# Altium PCB PCB1.PcbDoc
Units mil, origin at the board's own origin, x right, y up, seen from the top; angles counter-clockwise.
Board outline 8750 x 3800 mil, 2 copper layers (Top Layer, Bottom Layer); 78 components, 69 nets, 287 pads, 19 vias.
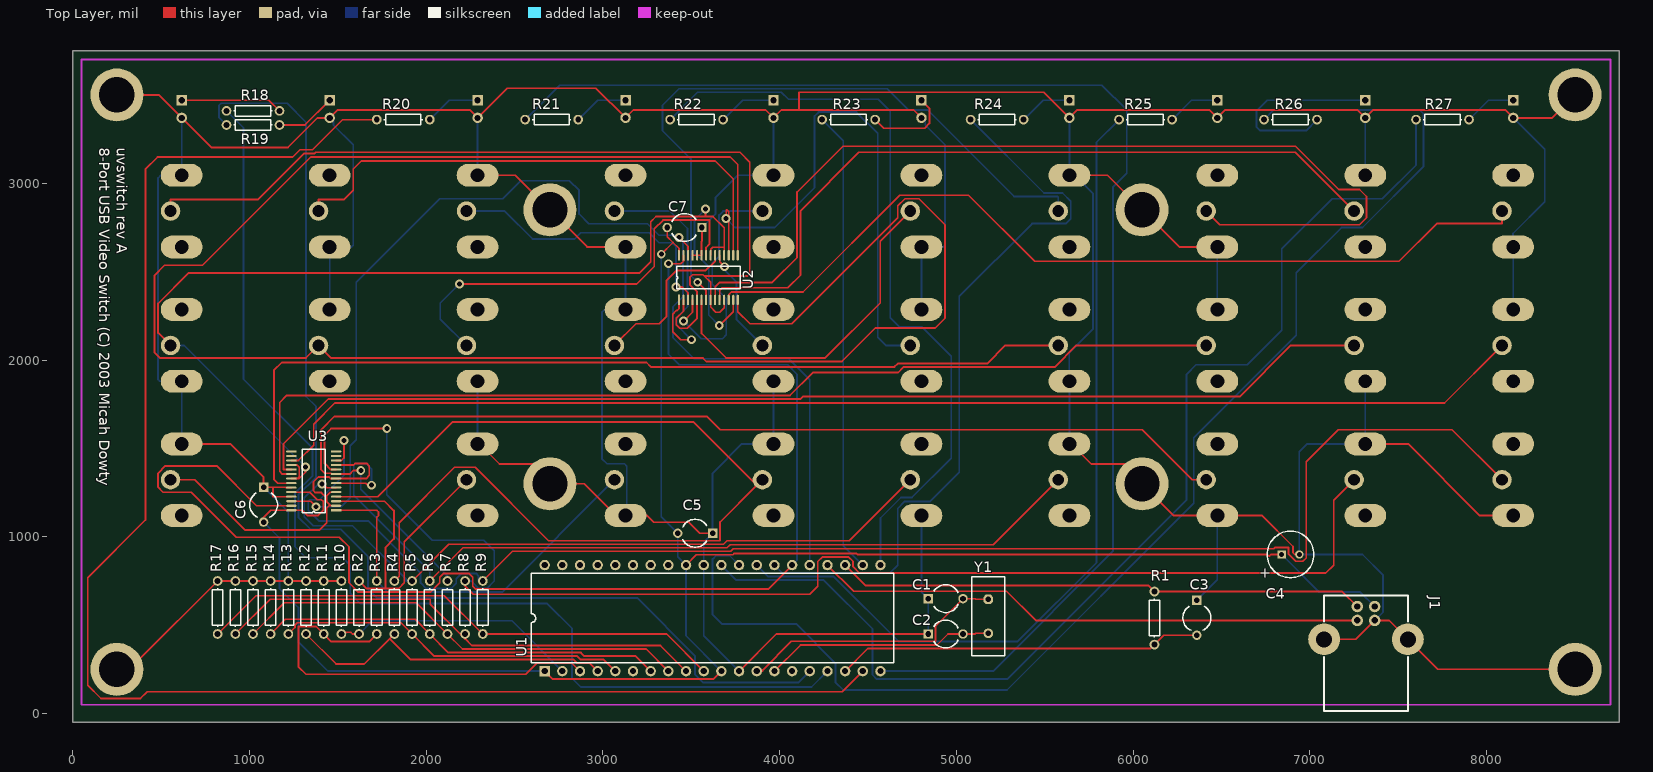
[diagram p0: Top Layer view]
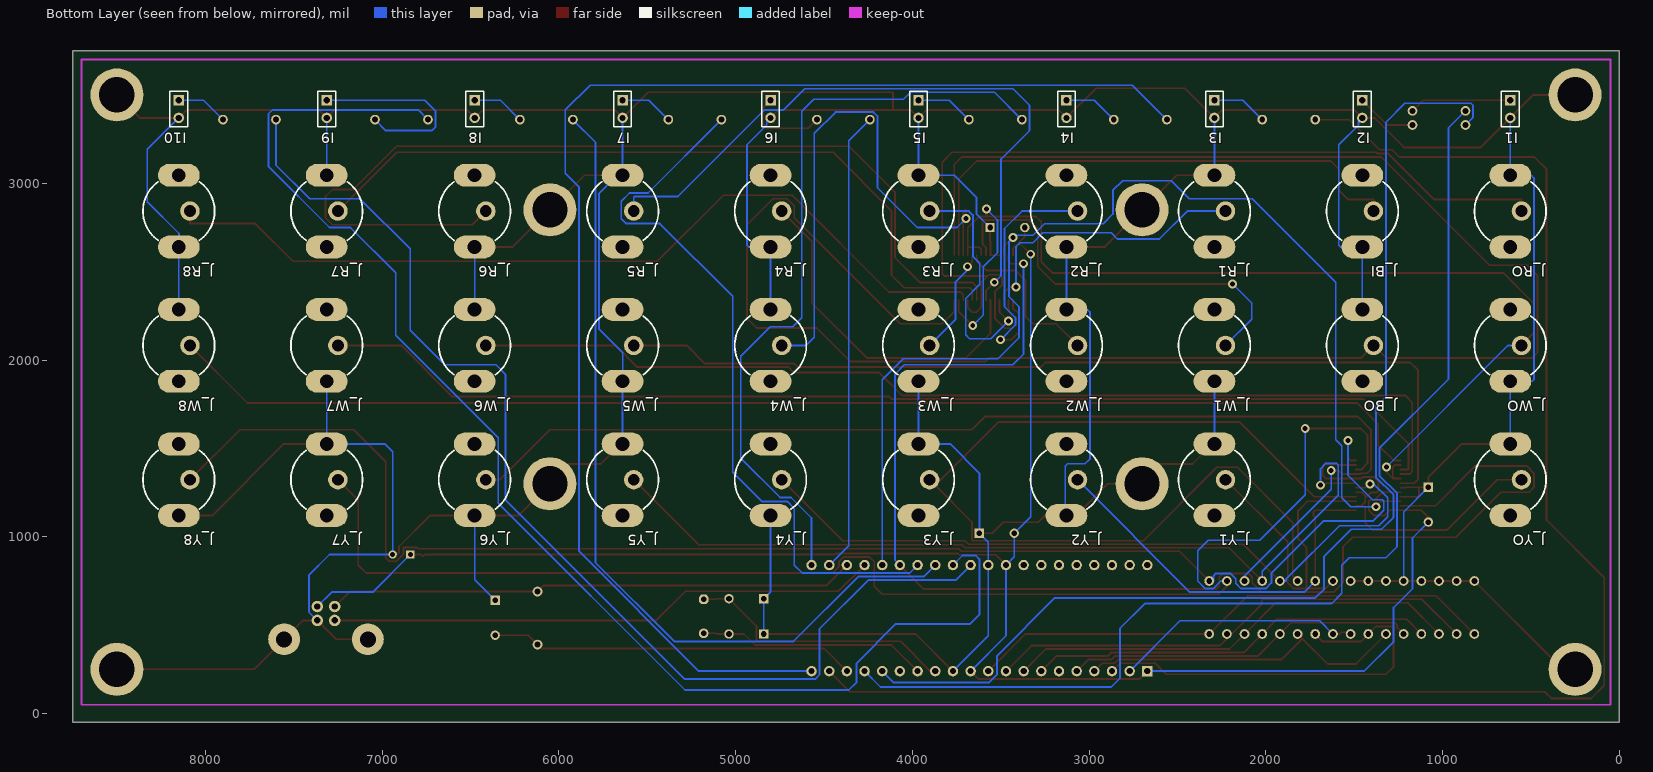
[diagram p1: Bottom Layer view, seen from below]

## Layer stack, top to bottom
Top Layer: signal copper 1.4
Dielectric: dielectric 12.6, FR-4, Dk 4.8
Bottom Layer: signal copper 1.4

## Board outline
0,-50 8750,-50 8750,3750 0,3750

## Design rules (kind name [scope] priority, off if disabled: settings)
Clearance [All] p1: gap=10
ComponentClearance [All] p1: gap=10 collisioncheckmode=0
HoleSize [All] p1: absolutevalues=TRUE maxlimit=200 minlimit=1 maxpercent=80.000 minpercent=20.000
PolygonConnect [All] p1: connectstyle=Relief reliefconductorwidth=10 reliefentries=4 polygonreliefangle="90 Angle"
RoomDefinition Sheet1 [InComponentClass('Sheet1')] p1: confinementstyle=ConfineIn formatcopy=TRUE outline 0,0 8750,0 8750,3750 0,3750
RoutingLayers [All] p1: top layer=Horizontal bottom layer=Vertical
RoutingVias [All] p1: holewidth=28 width=50 viastyle="Through Hole" minholewidth=28 minwidth=50 maxholewidth=28 maxwidth=50
SolderMaskExpansion [All] p1: expansion=4
TestPointUsage [All] p1: valid=0 allowmultiple=FALSE
Testpoint [All] p1: side=15 testpointundercomponent=TRUE minsize=40 maxsize=100 preferedsize=60 minholesize=0 maxholesize=40 preferedholesize=32 testpointgrid=1 style=1023 order=1234567890
Width [All] p1: maxlimit=10 minlimit=10 preferedwidth=10
15 further rules are at their usual default settings.

## Components (designator, comment, footprint, x,y, rotation, side; value= is the part's Value field where it differs from the comment)
C1 "Cap2" CAPR5-4X5 4840,650 r0 top
C2 "Cap2" CAPR5-4X5 4840,450 r0 top
C3 "" CAPR5-4X5 6360,640 r270 top
C4 "10uF" CAP-EE-1 6740,900 r180 top
C5 "" CAPR5-4X5 3620,1020 r180 top
C6 "" CAPR5-4X5 1080,1280 r270 top
C7 "" CAPR5-4X5 3560,2750 r180 top
I1 "" HDR1X2 616.67,3470 r270 bottom
I2 "" HDR1X2 1453.7,3470 r270 bottom
I3 "" HDR1X2 2290.74,3470 r270 bottom
I4 "" HDR1X2 3127.78,3470 r270 bottom
I5 "" HDR1X2 3964.81,3470 r270 bottom
I6 "" HDR1X2 4801.85,3470 r270 bottom
I7 "" HDR1X2 5638.89,3470 r270 bottom
I8 "" HDR1X2 6475.92,3470 r270 bottom
I9 "" HDR1X2 7312.96,3470 r270 bottom
I10 "" HDR1X2 8150,3470 r270 bottom
J1 "USB" USB-TYPEB 7080,420 r0 top
J_BI "" RCJ-02X 1453.7,3045.51 r270 bottom
J_BO "" RCJ-02X 1453.7,2285.51 r270 bottom
J_R1 "" RCJ-02X 2290.74,3045.51 r270 bottom
J_R2 "" RCJ-02X 3127.78,3045.51 r270 bottom
J_R3 "" RCJ-02X 3964.81,3045.51 r270 bottom
J_R4 "" RCJ-02X 4801.85,3045.51 r270 bottom
J_R5 "" RCJ-02X 5638.89,3045.51 r270 bottom
J_R6 "" RCJ-02X 6475.92,3045.51 r270 bottom
J_R7 "" RCJ-02X 7312.96,3045.51 r270 bottom
J_R8 "" RCJ-02X 8150,3045.51 r270 bottom
J_RO "" RCJ-02X 616.67,3045.51 r270 bottom (schematic designator J_YO)
J_W1 "" RCJ-02X 2290.74,2285.51 r270 bottom
J_W2 "" RCJ-02X 3127.78,2285.51 r270 bottom
J_W3 "" RCJ-02X 3964.81,2285.51 r270 bottom
J_W4 "" RCJ-02X 4801.85,2285.51 r270 bottom
J_W5 "" RCJ-02X 5638.89,2285.51 r270 bottom
J_W6 "" RCJ-02X 6475.92,2285.51 r270 bottom
J_W7 "" RCJ-02X 7312.96,2285.51 r270 bottom
J_W8 "" RCJ-02X 8150,2285.51 r270 bottom
J_WO "" RCJ-02X 616.67,2285.51 r270 bottom
J_Y1 "" RCJ-02X 2290.74,1525.51 r270 bottom
J_Y2 "" RCJ-02X 3127.78,1525.51 r270 bottom
J_Y3 "" RCJ-02X 3964.81,1525.51 r270 bottom
J_Y4 "" RCJ-02X 4801.85,1525.51 r270 bottom
J_Y5 "" RCJ-02X 5638.89,1525.51 r270 bottom
J_Y6 "" RCJ-02X 6475.92,1525.51 r270 bottom
J_Y7 "" RCJ-02X 7312.96,1525.51 r270 bottom
J_Y8 "" RCJ-02X 8150,1525.51 r270 bottom
J_YO "" RCJ-02X 616.67,1525.51 r270 bottom
R1 "Res1" AXIAL-0.3 6120,540 r90 top
R2 "" AXIAL-0.3 1620,600 r270 top
R3 "" AXIAL-0.3 1720,600 r270 top
R4 "" AXIAL-0.3 1820,600 r270 top
R5 "" AXIAL-0.3 1920,600 r270 top
R6 "" AXIAL-0.3 2020,600 r270 top
R7 "" AXIAL-0.3 2120,600 r270 top
R8 "" AXIAL-0.3 2220,600 r270 top
R9 "" AXIAL-0.3 2320,600 r270 top
R10 "" AXIAL-0.3 1520,600 r90 top
R11 "" AXIAL-0.3 1420,600 r90 top
R12 "" AXIAL-0.3 1320,600 r90 top
R13 "" AXIAL-0.3 1220,600 r90 top
R14 "" AXIAL-0.3 1120,600 r90 top
R15 "" AXIAL-0.3 1020,600 r90 top
R16 "" AXIAL-0.3 920,600 r90 top
R17 "" AXIAL-0.3 820,600 r90 top
R18 "" AXIAL-0.3 1020,3410 r180 top
R19 "" AXIAL-0.3 1020,3330 r180 top
R20 "" AXIAL-0.3 1870,3360 r180 top
R21 "" AXIAL-0.3 2710,3360 r180 top
R22 "" AXIAL-0.3 3530,3360 r180 top
R23 "" AXIAL-0.3 4390,3360 r180 top
R24 "" AXIAL-0.3 5230,3360 r180 top
R25 "" AXIAL-0.3 6070,3360 r180 top
R26 "" AXIAL-0.3 6890,3360 r180 top
R27 "" AXIAL-0.3 7750,3360 r180 top
U1 "PIC16C765" DIP-40 3620,540 r0 top
U2 "MAX4572" SSOP28 3430,2340 r90 top
U3 "MAX4572" SSOP28 1490,1150 r180 top
Y1 "6 MHz" BCY-W2/E4.7 5180,550 r270 top

## Footprints (in the part's own frame and the unit in brackets; to place one, negate y for a bottom-side part, rotate by r counter-clockwise, add the part's x,y. Pads: shape width x height; smd on the part's side, far side on the other; paste and mask are expansions set on the pad)
AXIAL-0.3 [mm]
  round 1.4 hole 0.85: 1(-3.81,0) 2(3.81,0)
  silkscreen extent -2.77,-0.76 2.77,0.76
BCY-W2/E4.7 [mm]
  oct 1.4x1.4 hole 0.8: 1(-2.44,0)
  round 1.4 hole 0.8: 2(2.44,0)
  silkscreen extent -5.7,-2.35 5.7,2.35
CAP-EE-1 [mm]
  rect 1.2x1.2 hole 0.7: 1(-2.54,0)
  round 1.2 hole 0.7: 2(-5.08,0)
  silkscreen extent -7.15,-3.34 -0.47,3.34
CAPR5-4X5 [mm]
  rect 1.35x1.35 hole 0.8: 1(0,0)
  round 1.35 hole 0.8: 2(5,0)
  silkscreen extent 0.81,-2 4.32,2
DIP-40 [mm]
  rect 1.5x1.5 hole 0.9: 1(-24.13,-7.62)
  round 1.5 hole 0.9: 2(-21.59,-7.62) 3(-19.05,-7.62) 4(-16.51,-7.62) 5(-13.97,-7.62) 6(-11.43,-7.62) 7(-8.89,-7.62) 8(-6.35,-7.62) 9(-3.81,-7.62) 10(-1.27,-7.62) 11(1.27,-7.62) 12(3.81,-7.62) 13(6.35,-7.62) 14(8.89,-7.62) 15(11.43,-7.62) 16(13.97,-7.62) 17(16.51,-7.62) 18(19.05,-7.62) 19(21.59,-7.62) 20(24.13,-7.62) 21(24.13,7.62) 22(21.59,7.62) 23(19.05,7.62) 24(16.51,7.62) 25(13.97,7.62) 26(11.43,7.62) 27(8.89,7.62) 28(6.35,7.62) 29(3.81,7.62) 30(1.27,7.62) 31(-1.27,7.62) 32(-3.81,7.62) 33(-6.35,7.62) 34(-8.89,7.62) 35(-11.43,7.62) 36(-13.97,7.62) 37(-16.51,7.62) 38(-19.05,7.62) 39(-21.59,7.62) 40(-24.13,7.62)
  silkscreen extent -26.05,-6.45 26.05,6.45
HDR1X2 [mm]
  rect 1.5x1.5 hole 0.9: 1(0,0)
  round 1.5 hole 0.9: 2(2.54,0)
  silkscreen extent -1.27,-1.27 3.81,1.27
RCJ-02X [mm]
  round 2.794 hole 1.7: 1(5.15,1.6)
  oval 3.302x6 hole 2: 2(0,0) 2(10.3,0)
  silkscreen extent 0.93,-5.15 9.37,5.15
SSOP28 [mm]
  rect 1.5x0.3 smd: 1(0,0)
  oval 1.5x0.3 smd: 2(0,-0.65) 3(0,-1.3) 4(0,-1.95) 5(0,-2.6) 6(0,-3.25) 7(0,-3.9) 8(0,-4.55) 9(0,-5.2) 10(0,-5.85) 11(0,-6.5) 12(0,-7.15) 13(0,-7.8) 14(0,-8.45) 15(6.42,-8.45) 16(6.42,-7.8) 17(6.42,-7.15) 18(6.42,-6.5) 19(6.42,-5.85) 20(6.42,-5.2) 21(6.42,-4.55) 22(6.42,-3.9) 23(6.42,-3.25) 24(6.42,-2.6) 25(6.42,-1.95) 26(6.42,-1.3) 27(6.42,-0.65) 28(6.42,0)
  silkscreen extent 1.59,-8.78 4.83,0.33
USB-TYPEB [mil]
  round 65 hole 36.22: 1(286.22,185.43) 2(187.8,185.43) 3(187.8,106.69) 4(286.22,106.69)
  round 180 hole 90.55: 5(0,0) 5(474.02,0)
  silkscreen extent 0,-406 474,248

## Part data
C1 C2: "Capacitor"
C3 C5 C6 C7: library part Cap2, "Capacitor"
C4: library part "Cap Pol1", "Polarized Capacitor (Radial)"
I1 I2 I3 I4 I5 I6 I7 I8 I9 I10: library part LED1, "Typical RED GaAs LED"
J1: library part "USB Type B", "Header, 4-Pin"
J_BI J_BO J_R1 J_R2 J_R3 J_R4 J_R5 J_R6 J_R7 J_R8 J_RO J_W1 J_W2 J_W3 J_W4 J_W5 J_W6 J_W7 J_W8 J_WO J_Y1 J_Y2 J_Y3 J_Y4 J_Y5 J_Y6 J_Y7 J_Y8 J_YO: library part RCA-COMPACT, "RCA Connector"
R1: "Resistor"
R2 R3 R4 R5 R6 R7 R8 R9 R10 R11 R12 R13 R14 R15 R16 R17 R18 R19 R20 R21 R22 R23 R24 R25 R26 R27: library part Res1, "Resistor"
U1: "EPROM-Based 8-Bit CMOS Microcontroller with USB"
U2 U3: "Serially Controlled, Clickless Audio/Video switch"
Y1: library part XTAL, "Crystal Oscillator"

## Free pads (board coordinates)
  round 300 hole 200: 0(250,250) 0(250,3500) 0(2700,1300) 0(2700,2850) 0(6050,1300) 0(6050,2850) 0(8500,250) 0(8500,3500)

## Via types
v1: diameter 50, hole 28, Top Layer to Bottom Layer, 19 vias

## Nets (pads, with @x,y where several pads share a name; then routed paths per layer and width w, separated by ;. In a path a pad name is that pad's centre, name@x,y a point inside that pad or via, vN(x,y) a via of type N, cw(c..) or ccw(c..) an arc to the next point about the centre after c; other vN are vias at no path point)
GND: C1.1 C2.1 C3.1 C4.2 C5.1 C6.1 C7.1 I1.2 I2.2 I3.2 I4.2 I5.2 I6.2 I7.2 I8.2 I9.2 I10.2 J1.4 J1.5 J_BI.2@1453.7,2640 J_BO.2@1453.7,2285.51 J_R1.2@2290.74,3045.51 J_R2.2@3127.78,2640 J_R3.2@3964.81,3045.51 J_R4.2@4801.85,2640 J_R5.2@5638.89,3045.51 J_R6.2@6475.92,2640 J_R7.2@7312.96,3045.51 J_R8.2@8150,2640 J_RO.2@616.67,3045.51 J_W1.2@2290.74,1880 J_W2.2@3127.78,2285.51 J_W3.2@3964.81,1880 J_W4.2@4801.85,2285.51 J_W5.2@5638.89,1880 J_W6.2@6475.92,2285.51 J_W7.2@7312.96,1880 J_W8.2@8150,2285.51 J_WO.2@616.67,1880 J_Y1.2@2290.74,1525.51 J_Y2.2@3127.78,1120 J_Y3.2@3964.81,1525.51 J_Y4.2@4801.85,1120 J_Y5.2@5638.89,1525.51 J_Y6.2@6475.92,1120 J_Y7.2@7312.96,1525.51 J_Y8.2@8150,1120 J_YO.2@616.67,1525.51 pad.0 R10.2 R11.2 R12.2 R13.2 R14.2 R15.2 R16.2 R17.2 U1.12 U1.31 U2.23 U2.24 U2.25 U3.23 U3.25 | length 39159.5
  Top Layer w10: pad.0@250,250 250,307 377,307 R17.2 R16.2 R15.2 R14.2 R13.2 R12.2 R11.2 R10.2 ; pad.0@250,3500 486.67,3500 I1.2 783.67,3203 1218,3203 1385,3370 I2.2 1498.7,3415 2245.74,3415 I3.2 2458.74,3538 2959.78,3538 I4.2 3172.78,3415 3919.82,3415 I5.2 4009.81,3415 4109.81,3415 ; J_YO.2@616.67,1525.51 891.49,1525.51 1080,1337 C6.1 1133.23,1280 ; U3.25 1133.23,1226.77 1133.23,1280 ; U3.23 1207.05,1277.95 1205,1280 1133.23,1280 ; J_Y1.2@2290.74,1525.51 2301,1525.51 2414.51,1412 2700,1412 2700,1300 2895,1300 3075,1120 3127.78,1120 3250,1120 3288,1082 3485,1082 3547,1020 C5.1 ; J_R1.2@2290.74,3045.51 2504.49,3045.51 2700,2850 2910,2640 J_R2.2@3127.78,2640 ; U2.25 U2.24 U2.23 3557.95,2670 3560,2672.05 C7.1 ; U1.12 3980,450 C2.1 ; I6.2 4756.85,3415 4109.81,3415 ; J_Y5.2@5638.89,1525.51 5649,1525.51 5762.51,1412 6050,1412 6050,1300 6230,1120 6475.92,1120 6729,1120 6904,945 6904,910 6914,900 C4.2 ; J_R5.2@5638.89,3045.51 5854.49,3045.51 6050,2850 6260,2640 J_R6.2@6475.92,2640 ; J1.5@7080,420 7259.53,420 J1.4 7447.32,526.69 7554.02,420 7724.02,250 pad.0@8500,250 ; J_Y7.2@7312.96,1525.51 7555.49,1525.51 7961,1120 J_Y8.2@8150,1120 ; pad.0@8500,3500 8370,3370 I10.2 8105,3415 7357.96,3415 I9.2 7267.96,3415 6520.92,3415 I8.2 6430.93,3415 5683.89,3415 I7.2 5493.89,3515 4109.81,3515 4109.81,3415
  Bottom Layer w10: J_YO.2@616.67,1525.51 616.67,1880 493,1880 483,1890 483,3030 498.51,3045.51 616.67,3045.51 I1.2 ; C6.1 1220,1140 R13.2 ; J_BO.2@1453.7,2285.51 1453.7,2640 1577,2640 1587,2650 1587,3218 1475,3330 1475,3370 I2.2 ; J_Y1.2@2290.74,1525.51 J_W1.2@2290.74,1880 ; J_R1.2@2290.74,3045.51 I3.2 ; J_Y2.2@3127.78,1120 3135,1120 3135,1400 3122,1413 3023,1413 2994,1442 2994,2270 3009.51,2285.51 3127.78,2285.51 J_R2.2@3127.78,2640 ; C7.1 3637,2827 3637,2920 3762.51,3045.51 3964.81,3045.51 I5.2 ; U1.12 3570,440 U1.31 3570,970 C5.1 3620,1360 3785.51,1525.51 3964.81,1525.51 J_W3.2@3964.81,1880 ; J_Y4.2@4801.85,1120 4801.85,688.15 C1.1 C2.1 ; J_W4.2@4801.85,2285.51 4801.85,2640 4925,2640 4935,2650 4935,3218 4823,3330 4823,3370 I6.2 ; J_Y5.2@5638.89,1525.51 5638.89,1880 5638,1880 5638,2041 5772,2175 5772,2943 5669.49,3045.51 5638.89,3045.51 I7.2 ; C3.1 6475.92,755.92 J_Y6.2@6475.92,1120 ; J_W6.2@6475.92,2285.51 J_R6.2@6475.92,2640 ; J_W7.2@7312.96,1880 7312.96,1525.51 6985.51,1525.51 6940,1480 C4.2 7297,900 7414,783 7414,574.47 J1.4 ; J_R7.2@7312.96,3045.51 I9.2 ; J_W8.2@8150,2285.51 8150,2640 8149,2640 8149,2716 8328,2895 8328,3192 I10.2
NetC1_2: C1.2 U1.13 Y1.1 | length 1535.8
  Top Layer w10: U1.13 3903,240 3903,246 4065.42,408.42 4882,408.42 4882,495.15 C1.2 5106,650 5109.94,646.06 Y1.1
NetC2_2: C2.2 U1.14 Y1.2 | length 1298.6
  Top Layer w10: U1.14 4118,388 4890,388 4952,450 C2.2 5106,450 5109.94,453.94 Y1.2
NetC3_2: C3.2 R1.1 U1.18 | length 2074.1
  Top Layer w10: U1.18 4498,368 6098,368 R1.1 6173.15,443.15 C3.2
NetI1_1: I1.1 R18.1 | length 578.2
  Top Layer w10: I1.1 1110,3470 R18.1
NetI2_1: I2.1 R19.1 | length 341.7
  Top Layer w10: R19.1 1313.7,3330 I2.1
NetI3_1: I3.1 R20.1 | length 316.3
  Bottom Layer w10: R20.1 2130,3470 I3.1
NetI4_1: I4.1 R21.1 | length 313.3
  Bottom Layer w10: R21.1 2970,3470 I4.1
NetI5_1: I5.1 R22.1 | length 330.4
  Bottom Layer w10: R22.1 3790,3470 I5.1
NetI6_1: I6.1 R23.1 | length 487.8
  Top Layer w10: R23.1 4588,3312 4820,3312 4847,3339 4847,3424.85 I6.1
NetI7_1: I7.1 R24.1 | length 304.5
  Bottom Layer w10: R24.1 5490,3470 I7.1
NetI8_1: I8.1 R25.1 | length 301.5
  Bottom Layer w10: R25.1 6330,3470 I8.1
NetI9_1: I9.1 R26.1 | length 1107.4
  Bottom Layer w10: R26.1 6978,3298 6719,3298 6697,3320 6697,3408 6759,3470 I9.1
NetI10_1: I10.1 R27.1 | length 295.6
  Bottom Layer w10: R27.1 8010,3470 I10.1
NetJ1_2: J1.2 R1.2 U1.23 | length 2995
  Top Layer w10: U1.23 4485,725 6085,725 R1.2 7183.23,690 J1.2
NetJ1_3: J1.3 U1.24 | length 3127.6
  Top Layer w10: U1.24 4418,692 5283,692 5448.31,526.69 J1.3
NetJ_BI_1: J_BI.1 U2.16 | length 3046.9
  Top Layer w10: J_BI.1 1390.71,2909 1536,2909 1587,2960 1587,3081 1632,3126 3635.09,3126 3737.09,3024 U2.16
NetJ_BO_1: J_BO.1 U2.14 U2.15 | length 11389.7
  Top Layer w10: U2.14 3762.68,2274.32 3832,2205 4069,2205 4668,2804 4668,2872 4709,2913 4788,2913 4935,2766 4935,2236 4880,2181 4541,2181 4352,1992 3585,1992 3566,2011 1462.47,2011 J_BO.1 1319.96,2012 492,2012 463,2041 463,2480 519,2536 734,2536 1347,3149 3720,3149 3762.68,3106.32 U2.15
NetJ_R1_1: J_R1.1 U2.3 | length 1647.1
  Top Layer w10: v1(3413,2414) 3447.18,2414 3481.18,2380 U2.3
  Bottom Layer w10: J_R1.1 2444.24,2842.76 2602,2685 2840,2685 2875,2720 3261,2720 3317,2664 3390,2664 3413,2641 v1(3413,2414)
NetJ_R2_1: J_R2.1 U2.1 | length 1464.7
  Top Layer w10: U2.1 3430,2290 3420,2280 3415,2280 3395,2260 3395,2160 3440,2115 v1(3500,2115)
  Bottom Layer w10: J_R2.1 3379.24,2842.76 3478,2744 3478,2302 3416,2240 3416,2199 v1(3500,2115)
NetJ_R3_1: J_R3.1 U2.4 | length 1415.1
  Top Layer w10: v1(3456,2220) 3506.77,2270.77 U2.4
  Bottom Layer w10: v1(3456,2220) 3556,2120 3676,2120 3698,2142 3698,2348 3618,2428 3618,2548 3657,2587 3657,2820 3679.76,2842.76 J_R3.1
NetJ_R4_1: J_R4.1 U2.6 | length 1977.1
  Top Layer w10: U2.6 3557.95,2150.05 3696,2012 4258,2012 4569,2323 4569,2672.9 J_R4.1
NetJ_R5_1: J_R5.1 U2.7 | length 3813.5
  Top Layer w10: v1(3536,2440) 3583.54,2392.46 U2.7
  Bottom Layer w10: v1(3536,2440) 3498,2478 3498,3137 3337,3298 3337,3442 3430,3535 4608,3535 4728,3415 4836,3415 5326,2925 5570.9,2925 5575.9,2920 J_R5.1
NetJ_R6_1: J_R6.1 U2.9 | length 5498.6
  Top Layer w10: U2.9 3634.72,2413.72 3660,2439 3958,2439 4098,2579 4098,2950 4358,3210 6918,3210 7163,2965 7280,2965 7320,2925 7320,2806 7280,2766 6489.69,2766 J_R6.1
NetJ_R7_1: J_R7.1 U2.10 | length 4318.2
  Top Layer w10: U2.10 3660.32,2394.32 3675,2409 4046,2409 4118,2481 4118,2845 4448,3175 6917.73,3175 J_R7.1
NetJ_R8_1: J_R8.1 U2.12 | length 4952.6
  Top Layer w10: U2.12 3711.5,2370 3726.5,2385 4132,2385 4680,2933 5068,2933 5442,2559 7504,2559 7717,2772 8087.01,2772 J_R8.1
NetJ_RO_1: J_RO.1 U2.2 U2.5 U2.8 U2.11 | length 5349.9
  Top Layer w10: J_RO.1 553.67,2909 1050,2909 1310,3169 1369,3169 1376,3176 3775,3176 3831,3120 3831,2489 3817,2475 3574.13,2475 ; U2.2 3455.59,2276.59 3415,2236 3415,2199 3434,2180 3476,2180 3532.36,2236.36 U2.5 3532.36,2386.64 3492,2427 3492,2468.62 3506.38,2483 3566.13,2483 3574.13,2475 ; U2.11 3685.91,2296.91 3660,2271 3638.13,2271 3609.13,2300 U2.8 3609.13,2440 3574.13,2475
NetJ_W1_1: J_W1.1 U2.22 | length 2349.1
  Top Layer w10: v1(2187.5,2430) 3191,2430 3290,2529 3290,2742 3340,2792 3602,2792 3602,2655 3583.54,2636.54 U2.22
  Bottom Layer w10: v1(2187.5,2430) 2080,2322.5 2080,2230.5 J_W1.1
NetJ_W2_1: J_W2.1 U2.20 | length 919.9
  Top Layer w10: J_W2.1 3187.03,2205 3319,2205 3359,2245 3359,2449 3417,2507 3581.72,2507 3634.72,2560 U2.20
NetJ_W3_1: J_W3.1 U2.19 | length 610
  Top Layer w10: U2.19 3660.32,2555.68 v1(3688,2528)
  Bottom Layer w10: v1(3688,2528) 3688,2508 3756,2440 3756,2228.58 J_W3.1
NetJ_W4_1: J_W4.1 U2.17 | length 3107.7
  Top Layer w10: v1(3697,2800) 3697,2847.5 3699.5,2850 3701.5,2850 3711.5,2840 3711.5,2800 U2.17
  Bottom Layer w10: v1(3697,2800) 3747,2750 3972,2750 4197,2975 4197,3380 4220,3403 4434,3403 4554,3283 4554,2128.76 4600,2082.76 J_W4.1
NetJ_W5_1: J_W5.1 U3.22 | length 5241.7
  Top Layer w10: U3.22 1160,1303.54 1138,1325.54 1138,1942 1182,1986 3246,1986 3271,1961 4649,1961 4668,1980 5174,1980 5276.76,2082.76 J_W5.1
NetJ_W6_1: J_W6.1 U3.20 | length 5838.2
  Top Layer w10: U3.20 1186.28,1354.72 1171,1370 1171,1760 1211,1800 4058,1800 4187,1929 4669,1929 4700,1960 5555,1960 5677.76,2082.76 J_W6.1
NetJ_W7_1: J_W7.1 U3.19 | length 6478.9
  Top Layer w10: U3.19 1192,1380.32 1192,1525 1447,1780 4118,1780 4131,1793 6602,1793 6891.76,2082.76 J_W7.1
NetJ_W8_1: J_W8.1 U3.17 | length 7189.5
  Top Layer w10: U3.17 1277,1431.5 1363,1517.5 1363,1637 1483,1757 7761.25,1757 J_W8.1
NetJ_WO_1: J_WO.1 U2.13 U2.18 U2.21 U3.18 U3.21 | length 6357.1
  Top Layer w10: J_WO.1 483,2153.43 483,2320 656,2493 3208,2493 3270,2555 3270,2782 3300,2812 3579.91,2812 ; U3.21 1271.13,1329.13 ; U3.18 1270,1405.91 1282,1393.91 1282,1340 1271.13,1329.13 ; v1(1317,1395) 1317,1366.13 1280,1329.13 1271.13,1329.13 ; v1(3579.91,2854) 3579.91,2812 ; U2.21 3609.13,2627.13 3620,2638 3685.91,2638 ; v1(3658,2195) 3737.09,2274.09 U2.13 ; U2.18 3685.91,2638 ; 3579.91,2812 3621.91,2812 3685.91,2748 3685.91,2638
  Bottom Layer w10: J_WO.1 629.24,2082.76 v1(1317,1395) ; v1(3579.91,2854) 3518,2792.09 3518,2608 3598,2528 3598,2255 v1(3658,2195)
NetJ_Y1_1: J_Y1.1 R2.1 U3.3 | length 1825.4
  Top Layer w10: U3.3 1763.82,1201.18 1817,1148 1817,988 1770,941 1770,707 ; R2.1 1663,707 1770,707 ; J_Y1.1 1876,971.01 1876,740 1843,707 1770,707
NetJ_Y2_1: J_Y2.1 R3.1 U3.1 | length 2272.5
  Top Layer w10: U3.1 1720,1150 1730,1140 1730,1120 1720,1110 R3.1
  Bottom Layer w10: R3.1 1783,687 2429.03,687 J_Y2.1
NetJ_Y3_1: J_Y3.1 R4.1 U3.4 | length 5605.6
  Top Layer w10: U3.4 1725,1226.77 2147.23,1649 3513.76,1649 J_Y3.1@3870.91,1291.85 ; R4.1 1847,777 1847,1080 2160,1393 2277,1393 2692,978 3662,978 3662,1082.93 J_Y3.1@3870.91,1291.85 ; J_Y3.1 J_Y3.1@3870.91,1291.85
NetJ_Y4_1: J_Y4.1 R5.1 U3.6 | length 4149.3
  Top Layer w10: v1(1410,1298) 1417.95,1298 1438,1277.95 U3.6 ; R5.1 2128,958 3682,958 3702,978 4394.1,978 J_Y4.1
  Bottom Layer w10: v1(1410,1298) 1388,1298 1310,1220 1310,1114 1361,1063 1583,1063 1886,760 1886,750 R5.1
NetJ_Y5_1: J_Y5.1 R6.1 U3.7 | length 5040.6
  Top Layer w10: U3.7 1658,1303.54 1669.54,1292 v1(1690,1292) ; R6.1 2208,938 3702,938 3719,955 5208.14,955 J_Y5.1
  Bottom Layer w10: v1(1690,1292) 1690,1385 1660,1415 1600,1415 1590,1405 1590,1234 2020,804 R6.1
NetJ_Y6_1: J_Y6.1 R7.1 U3.9 | length 6484.6
  Top Layer w10: v1(1630,1375) 1587.28,1375 1567,1354.72 U3.9 1464,1354.72 1459.72,1359 1426,1359 1405,1380 1405,1605 1481,1681 3588,1681 3663,1606 6051,1606 6334.24,1322.76 J_Y6.1
  Bottom Layer w10: v1(1630,1375) 1630,1270 2120,780 R7.1
NetJ_Y7_1: J_Y7.1 R8.1 U3.10 | length 7827.9
  Top Layer w10: U3.10 1460,1380.32 1425,1415.32 1425,1576 1461,1612 v1(1777,1612) ; R8.1 2220,720 2265,675 4170,675 4215,720 4215,860 4240,885 4390,885 4415,860 4415,830 4450,795 7089,795 7134,840 7134,1206.79 J_Y7.1
  Bottom Layer w10: v1(1777,1612) 1777,1237 2034,980 2325,980 2385,920 2385,750 2342,707 2298,707 2255,750 R8.1
NetJ_Y8_1: J_Y8.1 R9.1 U3.12 | length 8595.4
  Top Layer w10: U3.12 1520,1431.5 1535,1446.5 v1(1535,1545) ; R9.1 2488,918 3722,918 3736,932 6794.38,932 6801.38,939 6879,939 6879,902 6920,861 6960,861 6979,880 6979,1425 7160,1606 7803.76,1606 J_Y8.1
  Bottom Layer w10: v1(1535,1545) 1535,1349 1396,1210 1340,1210 1332,1202 1332,1150 1392,1090 1671,1090 1968,793 1968,739 2000,707 2140,707 2170,737 2170,763 2200,793 2282,793 2295,780 2295,750 R9.1
NetJ_YO_1: J_YO.1 U3.2 U3.5 U3.8 U3.11 | length 2018.8
  Top Layer w10: J_YO.1 691.24,1322.76 976,1038 1395,1038 1437,1080 1437,1162.59 1450,1175.59 1460,1175.59 ; U3.2 1460,1175.59 ; U3.5 1457.36,1252.36 1437,1232 1437,1220 ; U3.11 1590,1405.91 1599.09,1415 1663,1415 1678,1400 1678,1347.13 1660,1329.13 U3.8 1458.87,1329.13 1450,1338 1388.47,1338 1362,1311.53 1362,1260.47 1372.47,1250 1407,1250 1437,1220 ; 1437,1220 1437,1198.59 1460,1175.59
NetR2_2: R2.2 R10.1 U1.2 | length 1407.4
  Top Layer w10: R10.1 1530,460 1573,460 1583,450 R2.2
  Bottom Layer w10: R2.2 1695,525 2485,525 U1.2
NetR3_2: R3.2 R11.1 U1.3 | length 2378.8
  Top Layer w10: R3.2 1677,407 1463,407 R11.1 1377.44,492.56 1278,492.56 1277,491.56 1277,265 1320,222 2562,222 2625,285 2825,285 U1.3
NetR4_2: R4.2 R12.1 U1.4 | length 1893.2
  Top Layer w10: R12.1 1490,280 1650,280 1793.75,423.75 ; R4.2 1793.75,423.75 ; U1.4 2925,285 2855,285 2835,305 1912.5,305 1793.75,423.75
NetR5_2: R5.2 R13.1 U1.5 | length 1996.8
  Top Layer w10: R13.1 1257,487 1257,500 1270,513 1857,513 R5.2 2045,325 2855,325 2875,305 3005,305 U1.5
NetR6_2: R6.2 R14.1 U1.7 | length 2305.7
  Top Layer w10: R14.1 1203,533 1937,533 R6.2 2125,345 2875,345 2895,325 3185,325 U1.7
NetR7_2: R7.2 R15.1 U1.8 | length 2583.6
  Top Layer w10: R15.1 1197,627 1943,627 R7.2 2205,365 3245,365 U1.8
NetR8_2: R8.2 R16.1 U1.9 | length 2844.6
  Top Layer w10: R16.1 1117,647 2023,647 2023,619 2206,436 2220,422 ; R8.2 2220,422 ; U1.9 3325,385 2257,385 2220,422
NetR9_2: R9.2 R17.1 U1.10 | length 3016.8
  Top Layer w10: R17.1 1037,667 2103,667 R9.2 3360,450 U1.10
NetR18_2: R18.2 U1.17 | length 6346.6
  Bottom Layer w10: R18.2 966,3314 966,1891 1357,1500 1357,1346 1257,1246 1257,945 1320,882 1528,882 1570,840 1570,680 1628,622 2685,622 2825,482 2825,200 2875,150 4180,150 U1.17
NetR19_2: R19.2 U1.16 | length 6448.1
  Bottom Layer w10: R19.2 827,3373 827,3440 840,3453 1213,3453 1320,3346 1320,1794 1377,1737 1377,1337 1277,1237 1277,1111 1345,1043 1517,1043 1670,890 1670,704 1720,654 3193,654 3520,327 3520,223 3568,175 4105,175 U1.16
NetR20_2: R20.2 U1.19 | length 8960.3
  Top Layer w10: R20.2 1526.5,3360 1356.5,3190 1286,3190 1245,3149 480,3149 411,3080 411,1095 85,769 85,160 160,85 383,85 421,123 4353,123 U1.19
NetR21_2: R21.2 U1.20 | length 7666.9
  Bottom Layer w10: R21.2 2755,3555 5823,3555 5963,3415 5963,3056 5885,2978 5885,918 5207,240 U1.20
NetR22_2: R22.2 U1.21 | length 4341.7
  Bottom Layer w10: R22.2 3535,3515 4009.53,3515 4049.53,3475 4558,3475 4625,3408 4625,2240 4676,2189 4803,2189 4971,2021 4971,1445 4748,1222 4686,1222 4570,1106 U1.21
NetR23_2: R23.2 U1.22 | length 2615.3
  Bottom Layer w10: R23.2 4360,3240 4360,950 U1.22
NetR24_2: R24.2 U1.27 | length 4152.1
  Bottom Layer w10: U1.27 4015,795 4623,795 4668,840 4668,1160 4708,1200 4851,1200 5016,1365 5016,2360 5428,2772 5619.24,2772 5646,2798.76 5646,2899 5600,2945 5495,2945 R24.2
NetR25_2: R25.2 U1.28 | length 4844.7
  Bottom Layer w10: U1.28 3935,775 4305,775 4672,408 5346,408 5792,854 5792,3232 R25.2
NetR26_2: R26.2 U1.29 | length 7639.9
  Bottom Layer w10: U1.29 3716,894 3640,894 3620,874 3620,560 3673,507 4093,507 4315,285 4315,178 4360,133 5286,133 6342,1189 6342,1560 6922,2140 6922,2493 7179,2750 7297,2750 7643,3096 7643,3392 7620,3415 6795,3415 R26.2
NetR27_2: R27.2 U1.30 | length 6495.8
  Bottom Layer w10: U1.30 3755,755 4249,755 4525,479 4525,220 4550,195 5287,195 6302,1210 6302,1920 6355,1973 6645,1973 6841,2169 6841,2629 7125,2913 7410,2913 7600,3103 R27.2
NetU1_6: U1.6
NetU1_25: U1.25 U2.26 U3.26 | length 6520.8
  Top Layer w10: U3.26 1345.82,1201.18 v1(1377,1170) ; v1(3430,2694) 3481.18,2642.82 U2.26
  Bottom Layer w10: v1(1377,1170) 1520,1170 1570,1220 1570,1516 1604,1550 1604,2441 2076,2913 2433,2913 2535,3015 2810,3015 2865,2960 2865,2826 2920,2771 3252,2771 3317,2706 3418,2706 v1(3430,2694) 3453,2671 3453,2358 3396,2301 3396,2126 3515,2007 4051,2007 4170,1888 U1.25
NetU1_26: U1.26 U2.27 U3.27 | length 7582.4
  Top Layer w10: U3.27 1040,1175.59 814.59,1401 524,1401 483,1360 483,1280 511,1252 671,1252 925,998 1509,998 1563,944 1563,740 1616,687 2024,687 2077,740 2077,770 2100,793 2240,793 2263,770 2263,721 2280,704 3934,704 U1.26 ; v1(3370,2545) 3440.59,2545 3455.59,2560 U2.27
  Bottom Layer w10: v1(3370,2545) 3370,2034 3431,1973 4044.93,1973 4098,1919.93 4098,868 U1.26
NetU?_13: 
NetU?_14: 
VCC: C4.1 C5.2 C6.2 C7.2 J1.1 U1.1 U1.11 U1.32 U2.28 U3.24 U3.28 | length 10748
  Top Layer w10: C6.2 1080,1110 1120,1150 U3.28 1300,1150 1330,1120 1387,1120 1417,1150 1417,1200 1407,1210 1383.36,1210 1341,1252.36 U3.24 ; U1.1 2715,195 3625,195 U1.11 ; v1(3330,2598.85) 3396.43,2665.28 ; C7.2 3363.15,2698.57 3396.43,2665.28 ; U2.28 3430,2631.72 3396.43,2665.28 ; U1.32 3528,898 3735,898 3742,905 4435,905 4440,900 6759,900 6769,890 6779,900 C4.1
  Bottom Layer w10: C6.2 1170,993.15 1170,707 1277,600 1277,407 1444,240 U1.1 ; v1(3330,2598.85) 3330,1113.15 C5.2 3423.15,886.85 U1.32 3470,440 U1.11 ; C4.1 7053,687 7284.66,687 J1.1
pads on no net: J_BI.2@1453.7,3045.51 J_BO.2@1453.7,1880 J_R1.2@2290.74,2640 J_R2.2@3127.78,3045.51 J_R3.2@3964.81,2640 J_R4.2@4801.85,3045.51 J_R5.2@5638.89,2640 J_R6.2@6475.92,3045.51 J_R7.2@7312.96,2640 J_R8.2@8150,3045.51 J_RO.2@616.67,2640 J_W1.2@2290.74,2285.51 J_W2.2@3127.78,1880 J_W3.2@3964.81,2285.51 J_W4.2@4801.85,1880 J_W5.2@5638.89,2285.51 J_W6.2@6475.92,1880 J_W7.2@7312.96,2285.51 J_W8.2@8150,1880 J_WO.2@616.67,2285.51 J_Y1.2@2290.74,1120 J_Y2.2@3127.78,1525.51 J_Y3.2@3964.81,1120 J_Y4.2@4801.85,1525.51 J_Y5.2@5638.89,1120 J_Y6.2@6475.92,1525.51 J_Y7.2@7312.96,1120 J_Y8.2@8150,1525.51 J_YO.2@616.67,1120 U1.15 U1.33 U1.34 U1.35 U1.36 U1.37 U1.38 U1.39 U1.40 U3.13 U3.14 U3.15 U3.16

## Keep-outs
Keep-Out Layer:
  lines w10: 50,50 8700,50 8700,3700 50,3700 50,3250 50,50

## Silkscreen, mask and mechanical layers (free items; w line width, h text height)
Top Overlay:
  text "8-Port USB Video Switch (C) 2003 Micah Dowty" at 150,3200 h60 r270
  text "uvswitch rev A" at 250,3200 h60 r270

## Text inside footprints (layer, text, board x,y; h text height)
C4: Top Overlay "+" at 6780,820 h59.06 r180